# EAGLE board TiltyOmni (EAGLE 6.5.0)
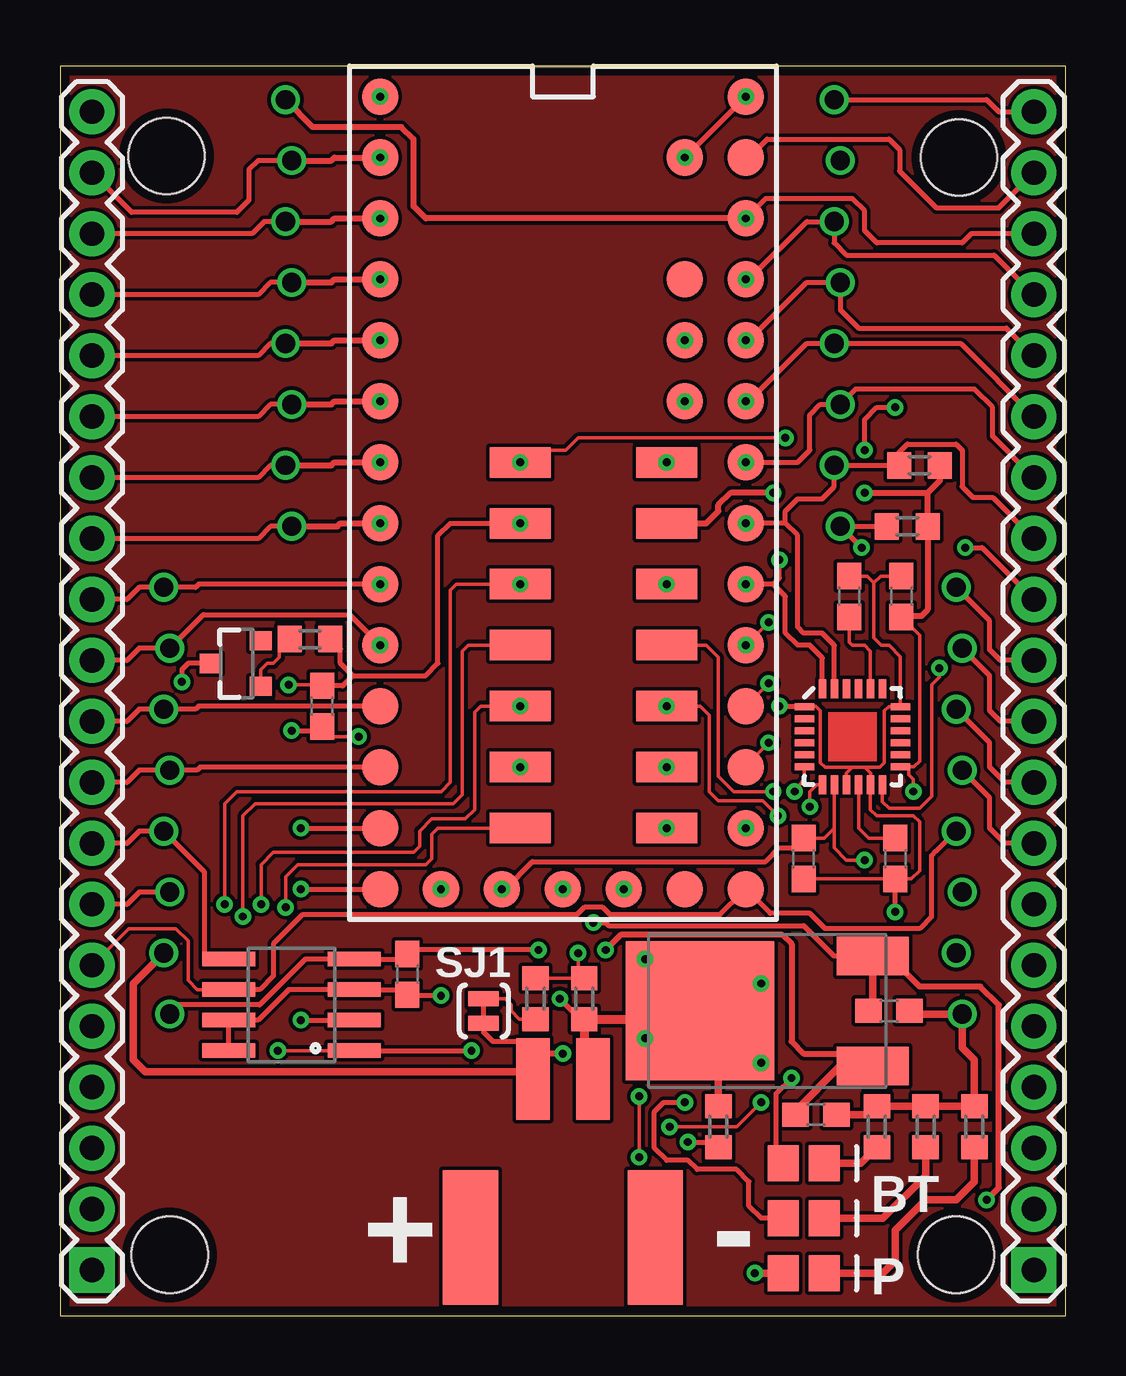
[diagram p0: board, top side]
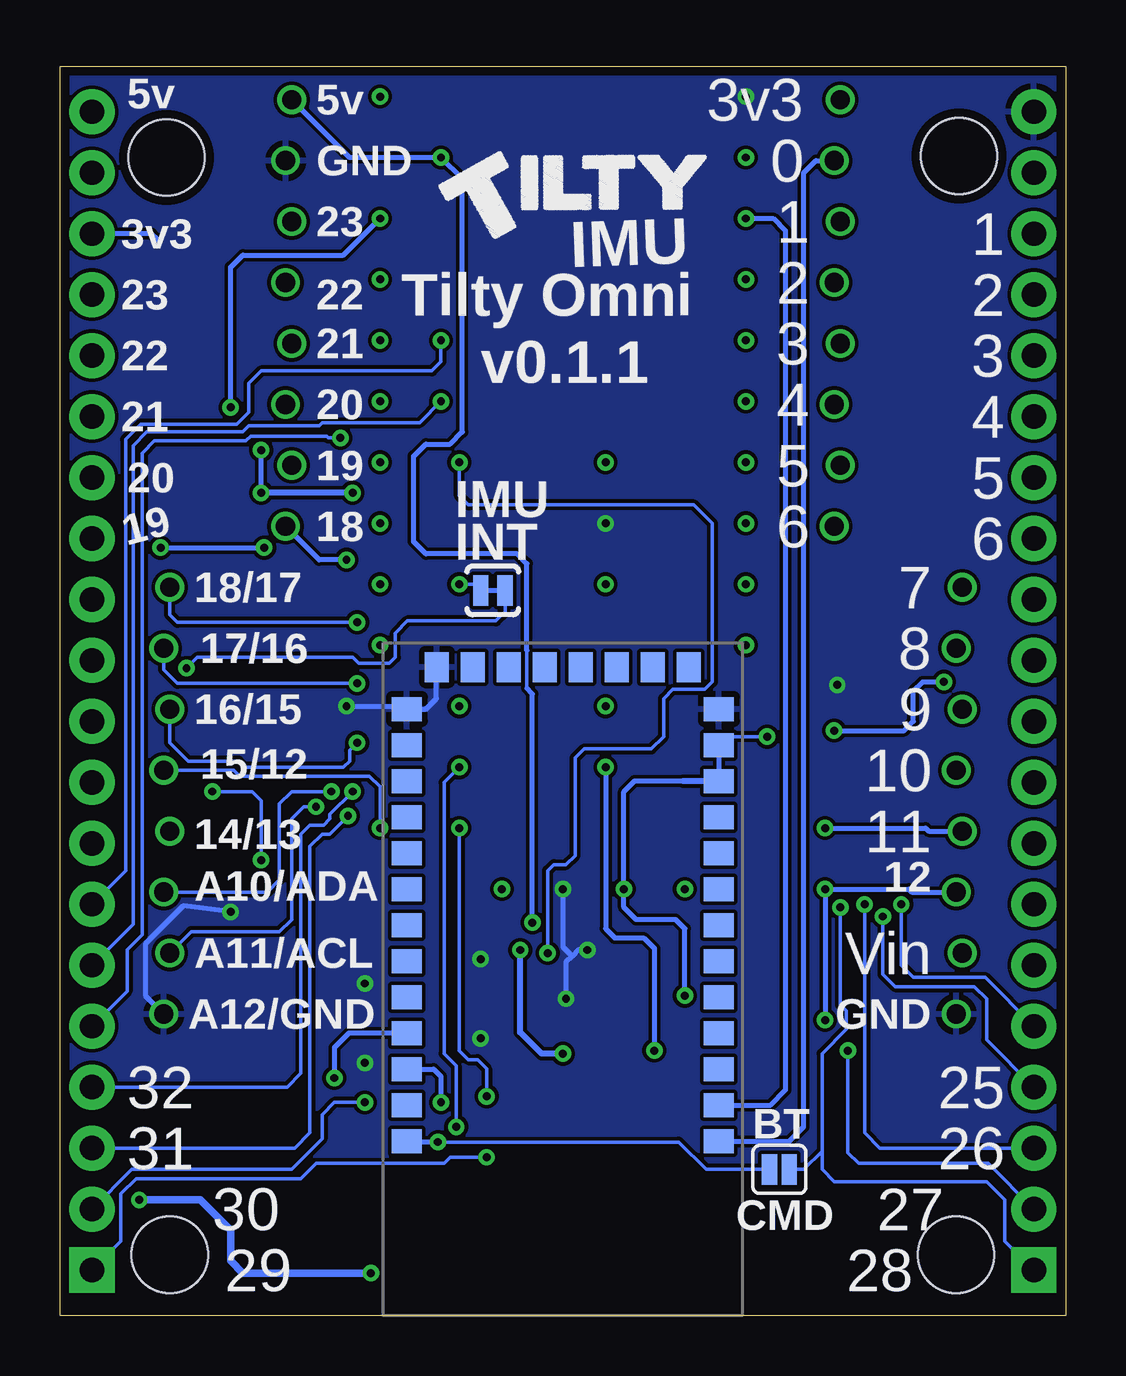
[diagram p1: board, bottom side, seen from below]

Size 41.91 x 52.07 mm. Coordinates in mm from the lower left corner, seen from the top.
Outline: 0,0 41.91,0 41.91,52.07 0,52.07 0,0
Copper layers (1*16): Top 0.0356mm / dielectric 1.5011mm / Bottom 0.0356mm
Design rules "LaenPCBOrder": minimum track width 6mil, minimum drill 13mil, track to track 6mil, track to pad 6mil, pad to pad 6mil, via to via 6mil, smd to smd 6mil, copper to edge 15mil, drill to drill 6mil, minimum pad ring 7mil, minimum via ring 7mil, stop-mask expansion 4mil, vias tented up to drill 0mil, thermal gap 10mil
Holes 3.17 mm at 37.34,2.54 4.57,2.54 4.45,48.32 37.47,48.26

## Footprints (pad centres in the part's own frame; a part is rotated, then mirrored left to right if it is on the bottom)
C0603 = smd 1.1 x 1: 1 -0.85,0; 2 0.85,0
LED-0805 = smd 1.3 x 1.5: 1 -0.85,0; 2 0.85,0
SOT23-3 = smd 0.8 x 0.9: 1 -0.95,-1; 2 0.95,-1; 3 0,1.1
8-PIN_RECEPTACLE_LOCK_NO-SS = drill 0.8: P$1 -8.89,-0.127; P$2 -6.35,0.127; P$3 -3.81,-0.127; P$4 -1.27,0.127; P$5 1.27,-0.127; P$6 3.81,0.127; P$7 6.35,-0.127; P$8 8.89,0.127
2-POS_SMD_TERMINAL_BLOCK = smd 2.3 x 5.6: P$1 -3.85,-2.325; P$2 3.85,-2.325 | smd 1.4 x 3.4: P$3 -1.25,4.275; P$4 1.25,4.275
1X20 = drill 1.016 pad 1.88 square: 1 0,0 | drill 1.016 pad 1.88: 2 2.54,0; 3 5.08,0; 4 7.62,0; 5 10.16,0; 6 12.7,0; 7 15.24,0; 8 17.78,0; 9 20.32,0; 10 22.86,0; 11 25.4,0; 12 27.94,0; 13 30.48,0; 14 33.02,0; 15 35.56,0; 16 38.1,0; 17 40.64,0; 18 43.18,0; 19 45.72,0; 20 48.26,0
SJ_2S-TRACE = smd 0.635 x 1.27: 1 -0.508,0; 2 0.508,0
R0603 = smd 1 x 1.1: 1 -0.85,0; 2 0.85,0
SJ_2S = smd 0.635 x 1.27: 1 -0.412,0; 2 0.412,0
TEENSY_3.0_ALLPINS-SMD = smd 1.524 x 1.524: 0 -7.62,13.97; 1 -7.62,11.43; 2 -7.62,8.89; 3 -7.62,6.35; 3.3V 7.62,11.43; 3.3V1 -2.54,-16.51; 4 -7.62,3.81; 5 -7.62,1.27; 6 -7.62,-1.27; 7 -7.62,-3.81; 8 -7.62,-6.35; 9 -7.62,-8.89; 10 -7.62,-11.43; 11 -7.62,-13.97; 12 -7.62,-16.51; 13 7.62,-16.51; 14/A0 7.62,-13.97; 15/A1 7.62,-11.43; 16/A2 7.62,-8.89; 17/A3 7.62,-6.35; 18/A4 7.62,-3.81; 19/A5 7.62,-1.27; 20/A6 7.62,1.27; 21/A7 7.62,3.81; 22/A8 7.62,6.35; 23/A9 7.62,8.89; A10 5.08,6.35; A11 5.08,3.81; AGND 7.62,13.97; AREF 5.08,8.89; GND -7.62,16.51; GND1 0,-16.51; PGM 2.54,-16.51; RESET 5.08,-16.51; VBAT -5.08,-16.51; VIN 7.62,16.51; VUSB 5.08,13.97 | smd 2.54 x 1.27: 3.3V2 4.318,-1.27; 24 -1.778,-3.81; 25 -1.778,-6.35; 26 -1.778,-8.89; 27 -1.778,-11.43; 28 -1.778,-13.97; 29 4.318,-13.97; 30 4.318,-11.43; 31 4.318,-8.89; 32 4.318,-6.35; 33 4.318,-3.81; A12 -1.778,1.27; A13 4.318,1.27; GND2 -1.778,-1.27
HC-09_BREAKOUT = smd 1.25 x 1: P$1 -6.5,10.5; P$2 -6.5,9; P$3 -6.5,7.5; P$4 -6.5,6; P$5 -6.5,3; P$6 -6.5,4.5; P$7 -6.5,1.5; P$8 -6.5,0; P$9 -6.5,-1.5; P$10 -6.5,-3; P$11 -6.5,-4.5; P$12 -6.5,-6; P$13 -6.5,-7.5; P$22 6.5,-7.5; P$23 6.5,-6; P$24 6.5,-4.5; P$25 6.5,-3; P$26 6.5,-1.5; P$27 6.5,0; P$28 6.5,1.5; P$29 6.5,3; P$30 6.5,4.5; P$31 6.5,6; P$32 6.5,7.5; P$33 6.5,9; P$34 6.5,10.5 | smd 1 x 1.25: P$14 -5.25,-9.25; P$15 -3.75,-9.25; P$16 -2.25,-9.25; P$17 -0.75,-9.25; P$18 0.75,-9.25; P$19 2.25,-9.25; P$20 3.75,-9.25; P$21 5.25,-9.25
TO263 = smd 5.791 x 6.198: P$1 0,2.794 | smd 1.6 x 2.997: P$2 -2.286,-4.394; P$3 2.286,-4.394
QFN-24 = smd 0.8 x 0.3: 1 -2,1.25; 2 -2,0.75; 3 -2,0.25; 4 -2,-0.25; 5 -2,-0.75; 6 -2,-1.25; 13 2,-1.25; 14 2,-0.75; 15 2,-0.25; 16 2,0.25; 17 2,0.75; 18 2,1.25 | smd 0.3 x 0.8: 7 -1.25,-2; 8 -0.75,-2; 9 -0.25,-2; 10 0.25,-2; 11 0.75,-2; 12 1.25,-2; 19 1.25,2; 20 0.75,2; 21 0.25,2; 22 -0.25,2; 23 -0.75,2; 24 -1.25,2
SO08 = smd 0.61 x 2.21: 1 -1.905,-2.616; 2 -0.635,-2.616; 3 0.635,-2.616; 4 1.905,-2.616; 5 1.905,2.616; 6 0.635,2.616; 7 -0.635,2.616; 8 -1.905,2.616

## Placement (x,y rotation side)
C1  0.1uF  [C0603]  34.8,19.05 270 top
C2  0.1uF  [C0603]  30.99,19.05 90 top
C3  2.2nF  [C0603]  32.89,29.97 90 top
C4  0.1uF  [C0603]  31.5,8.38 0 top
C5  4.7uF  [C0603]  34.54,12.7 0 top
C9  0.1uF  [C0603]  10.92,25.4 90 top
C11  0.1uF  [C0603]  35.05,29.97 270 top
C13  0.1uF  [C0603]  14.48,14.22 270 top
D1  RED  [LED-0805]  30.99,6.35 0 top
D2  GREEN  [LED-0805]  30.99,1.78 0 top
D3  YELLOW  [LED-0805]  30.99,4.06 0 top
D5  [SOT23-3]  7.37,27.18 90 top
JP1  8-PIN_HEADER  [8-PIN_RECEPTACLE_LOCK_NO-SS]  9.53,41.78 270 top
JP2  8-PIN_HEADER  [8-PIN_RECEPTACLE_LOCK_NO-SS]  4.45,21.46 270 top
JP3  8-PIN_HEADER  [8-PIN_RECEPTACLE_LOCK_NO-SS]  37.47,21.46 270 top
JP4  8-PIN_HEADER  [8-PIN_RECEPTACLE_LOCK_NO-SS]  32.38,41.78 270 top
JP5  2-POS_SMD_TERM_BLOCK  [2-POS_SMD_TERMINAL_BLOCK]  20.95,5.59 0 top
JP6  M20  [1X20]  1.33,1.91 90 top
JP7  M20  [1X20]  40.58,1.91 90 top
MPU_INT  SOLDERJUMPERTRACE  [SJ_2S-TRACE]  23.88,30.23 0 bottom
R1  4.7K  [R0603]  35.81,35.43 0 top
R2  4.7K  [R0603]  35.31,32.89 0 top
R3  180  [R0603]  34.04,7.87 270 top
R4  68  [R0603]  38.1,7.87 90 top
R5  10k  [R0603]  19.81,13.21 90 top
R6  680  [R0603]  21.84,13.21 90 top
R7  10K  [R0603]  27.43,7.87 270 top
R8  68  [R0603]  36.07,7.87 270 top
R9  [R0603]  10.41,28.19 180 top
SJ4  SOLDERJUMPERTRACE  [SJ_2S-TRACE]  17.65,12.7 90 top
SJ5  [SJ_2S]  11.94,6.1 180 bottom
U1  TEENSY_3.0_ALLPINSTEENSY_3.0_ALLPINS-SMD  [TEENSY_3.0_ALLPINS-SMD]  20.95,34.29 0 top
U2  HC-09_BREAKOUT  [HC-09_BREAKOUT]  20.95,17.78 180 bottom
U4  LM2931  [TO263]  29.46,12.7 90 top
U5  MPU-6050  [QFN-24]  33.02,24.13 0 top
U7  SPI_FLASH-X25XXSMD  [SO08]  9.65,12.95 90 top

## Library data of the parts
C1 C9 C13 = resistor; RATED_VOLTAGE: 2
C2 C4 C5 C11 R1-R9 = resistor
C3 = resistor; RATED_VOLTAGE: 50
D1-D3 = SparkFun-LED
D5 = SparkFun-DiscreteSemi; PART#: BZX84C3V3LT1GOSCT-ND
JP1-JP4 = My Parts
JP5 = My Parts; PART#: 277-2337-1-ND; POSSIBLE_ALT: 009276002021106
JP6 JP7 = SparkFun-Connectors
MPU_INT SJ4 SJ5 = SparkFun-Passives
U1 = Teensy3.0
U2 = csr
U4 = on-semiconductor; COST: 0.53
U5 = SparkFun-Sensors
U7 = SparkFun-DigitalIC; PART#: S25FL204K0TMFI043

## Nets
3V_SCL: JP4.P$7 JP7.13 R1.1 U1.19/A5 U5.23
3V_SDA: JP4.P$8 JP7.12 R2.1 U1.18/A4 U5.24
4/PWM: JP1.P$6 JP6.15 U1.4
5/PWM: JP1.P$7 JP6.14 U1.5
5V_SCL: JP3.P$2 JP7.10 U1.16/A2
5V_SDA: JP3.P$1 JP7.11 U1.17/A3
6/PWM: JP1.P$8 JP6.13 U1.6
7/RX3: JP2.P$1 JP6.12 U1.7
8/TX3: JP2.P$2 JP6.11 U1.8
9/RX2: JP2.P$3 JP6.10 U1.9
10/TX2: JP2.P$4 JP6.9 U1.10
14/A0: JP3.P$4 JP7.8 U1.14/A0
15/A1: JP3.P$3 JP7.9 U1.15/A1
20/A6: JP4.P$6 JP7.14 U1.20/A6
21/A7: JP4.P$5 JP7.15 U1.21/A7
24: JP6.5 U1.24
25: JP6.4 U1.25
26: JP6.3 U1.26
29: JP7.1 U1.29
30: JP7.2 U1.30
31: JP7.3 U1.31
32: JP7.4 U1.32
+3V3: C2.2 C9.1 C11.2 C13.2 D5.3 JP1.P$1 JP7.18 R1.2 R2.2 U1.3.3V U1.3.3V1 U1.3.3V2 U2.P$11 U2.P$12 U5.8 U5.13 U7.3 U7.7 U7.8
+5V: C5.1 D2.1 JP4.P$1 JP7.20 U1.VIN U1.VUSB U4.P$3
A10: JP7.7 U1.A10
A11: JP7.6 U1.A11
A12: JP7.5 U1.A12
AGND: JP7.19 U1.AGND
AREF: U1.AREF
AUXCL [I/O]: JP3.P$7 U5.7
AUXDA [I/O]: JP3.P$6 U5.6
BATT_SENSE: R5.2 R6.2 U1.A13
BLUETOOTH_RX: JP1.P$2 JP6.19 U1.0 U2.P$1
BLUETOOTH_TX: JP1.P$3 JP6.18 U1.1 U2.P$2
BT_CMD: JP6.1 SJ5.1 U1.28
CMD: R7.2 SJ5.2 U2.P$34
GND: C1.2 C2.1 C3.2 C4.2 C5.2 C9.2 C11.1 C13.1 JP2.P$8 JP3.P$8 JP4.P$2 JP5.P$4 JP6.20 R3.1 R4.2 R6.1 R7.1 R8.1 R9.1 U1.GND U1.GND1 U1.GND2 U2.P$13 U2.P$21 U2.P$22 U4.P$1 U5.1 U5.9 U5.11 U5.18 U7.4
IMU_INT: MPU_INT.1 U1.33
MEMORY_CS: JP6.2 U1.27 U7.1
MISO: JP2.P$6 JP6.7 U1.12 U7.2
MOSI: JP2.P$5 JP6.8 U1.11 U7.5
N$1: C1.1 U5.10
N$2: C3.1 U5.20
N$3: D1.2 R3.2
N$5: D5.1 R9.2
N$9: R5.1 SJ4.2
N$13: D2.2 R4.1
N$14: D1.1 U2.P$31
N$16: MPU_INT.2 U5.12
N$24: D3.2 R8.2
SCK: JP3.P$5 JP6.6 U1.13 U7.6
SERVO_1: JP1.P$4 JP6.17 U1.2
SERVO_2: JP1.P$5 JP6.16 U1.3
SERVO_3: JP4.P$4 JP7.16 U1.22/A8
SERVO_4: JP4.P$3 JP7.17 U1.23/A9
VBAT: U1.VBAT
VCC: C4.1 JP2.P$7 JP5.P$3 SJ4.1 U4.P$2
YEL_LED: D3.1 U2.P$32

## Tracks (layer width: path | path; a pad name or v marks a point on that pad's centre or on a via)
3V_SCL  (via drill 0.33)
  Top 0.203: U5.23 32.27,27.93 31.75,28.45 30.99,28.45 30.73,28.7 30.73,32.51 30.23,33.02 | 30.23,33.02 U1.19/A5 | 30.23,33.02 30.23,33.53 30.73,34.04 31.75,34.04 32.26,34.54 JP4.P$7 R1.1 34.96,35.98 35.31,36.32 37.34,36.32 37.59,36.07 37.59,34.54 38.04,34.1 38.86,34.1 JP7.13
  other vias: 28.57,33.02
3V_SDA  (via drill 0.33)
  Top 0.203: U5.24 31.77,27.41 31.24,27.94 30.73,27.94 30.23,28.45 30.23,29.97 29.72,30.48 | 29.72,30.48 U1.18/A4 | 29.72,30.48 29.97,30.73 v29.97,31.5 | R2.1 JP4.P$8 v33.4,32 | v37.72,32 38.42,32 JP7.12
  Bottom 0.203: v37.72,32 v33.4,32 | v29.97,31.5 31.11,31.5 JP4.P$8
  other vias: 28.57,30.48
4/PWM  (via drill 0.33)
  Top 0.203: JP1.P$6 8.76,37.97 8.26,37.47 JP6.15
  Top 0.254: JP1.P$6 11.3,37.97 11.43,38.1 v13.34,38.1
5/PWM  (via drill 0.33)
  Top 0.203: JP1.P$7 8.76,35.43 8.26,34.92 JP6.14
  Top 0.254: JP1.P$7 11.3,35.43 11.43,35.56 v13.34,35.56
5V_SCL  (via drill 0.33)
  Top 0.152: U1.16/A2 v29.53,26.35
  Top 0.203: JP7.10 39.18,24.77 38.73,25.21 38.73,26.67 JP3.P$2
  Bottom 0.152: v29.53,26.35 37.02,26.35 37.59,26.92 JP3.P$2
5V_SDA  (via drill 0.33)
  Top 0.152: U1.17/A3 v29.53,28.89
  Top 0.203: JP7.11 39.18,27.3 38.73,27.75 38.73,28.96 JP3.P$1
  Bottom 0.152: v29.53,28.89 37.02,28.89 37.34,29.21 JP3.P$1
  other vias: 28.57,27.94
6/PWM  (via drill 0.33)
  Top 0.203: JP1.P$8 8.76,32.89 8.26,32.38 JP6.13
  Top 0.254: JP1.P$8 11.56,32.89 11.68,33.02 v13.34,33.02
7/RX3  (via drill 0.33)
  Top 0.203: v13.34,30.48 5.78,30.48 5.65,30.35 JP2.P$1 3.3,30.35 2.79,29.84 JP6.12
8/TX3  (via drill 0.33)
  Top 0.203: v13.34,27.94 12.06,29.21 5.97,29.21 JP2.P$2 3.3,27.81 2.79,27.3 JP6.11
9/RX2
  Top 0.203: U1.9 5.78,25.4 5.65,25.27 JP2.P$3 3.3,25.27 2.79,24.77 JP6.10
10/TX2
  Top 0.203: U1.10 5.84,22.86 5.71,22.73 JP2.P$4 3.3,22.73 2.79,22.23 JP6.9
14/A0  (via drill 0.33)
  Top 0.203: JP7.8 39.37,19.68 38.73,20.32 38.73,21.59 JP3.P$4
  Bottom 0.152: JP3.P$4 34.67,22.73 34.42,22.48 29.02,22.48 28.57,22.04 U1.14/A0
  other vias: 28.57,20.32
15/A1  (via drill 0.33)
  Top 0.152: U1.15/A1 28.57,22.92 v29.53,23.88
  Top 0.203: JP7.9 39.37,22.23 38.73,22.86 38.73,23.88 JP3.P$3
  Bottom 0.152: v29.53,23.88 29.84,23.56 29.84,23.11 30.1,22.86 34.23,22.86 34.48,23.11 36.58,23.11 37.34,23.88 JP3.P$3
20/A6  (via drill 0.33)
  Top 0.203: JP7.14 38.86,36.64 38.86,37.85 38.1,38.61 33.15,38.61 JP4.P$6 31.69,37.97 31.24,37.53 31.24,36.07 30.73,35.56 U1.20/A6
  other vias: 28.57,35.56
21/A7  (via drill 0.33)
  Top 0.203: U1.21/A7 28.7,38.1 31.11,40.51 JP4.P$5 37.53,40.51 JP7.15
  other vias: 28.57,38.1
24  (via drill 0.33)
  Top 0.152: U1.24 16.51,30.48 16.26,30.23 16.26,22.23 15.88,21.84 7.37,21.84 6.86,21.34 v6.86,17.14
  Bottom 0.152: v6.86,17.14 6.86,14.61 6.35,14.1 3.37,14.1 JP6.5
  other vias: 19.18,30.48
25  (via drill 0.33)
  Top 0.152: U1.25 17.02,27.94 16.76,27.69 16.76,21.72 16.38,21.34 8.13,21.34 7.62,20.83 v7.62,16.64
  Bottom 0.152: JP6.4 3.3,11.49 3.3,13.21 3.81,13.72 7.11,13.72 7.62,14.22 v7.62,16.64
26  (via drill 0.33)
  Top 0.152: U1.26 17.53,25.4 17.27,25.15 17.27,21.08 16.89,20.7 15.49,20.7 14.99,20.19 14.99,19.56 14.73,19.3 8.89,19.3 8.38,18.8 v8.38,17.14
  Bottom 0.152: v8.38,17.14 8.38,7.62 7.75,6.99 JP6.3
  other vias: 19.18,25.4
29  (via drill 0.33)
  Top 0.152: v24.13,9.14 v24.13,6.6
  Bottom 0.152: JP7.1 39.37,3.11 39.37,5.08 38.73,5.71 31.88,5.71 31.24,6.35 25.91,6.35 25.65,6.6 v24.13,6.6 | U1.29 25.27,11.05 24.89,10.67 24.51,10.67 24.13,10.29 v24.13,9.14
  other vias: 25.27,20.32
30  (via drill 0.33)
  Top 0.152: v25.4,7.87 28.19,7.87 v29.21,8.89
  Bottom 0.152: v29.21,8.89 30.48,8.89 30.99,8.38 30.99,7.37 32.26,6.1 38.92,6.1 JP7.2 | U1.30 25.91,22.23 25.91,10.92 25.4,10.41 v25.4,7.87
  other vias: 25.27,22.86
31  (via drill 0.33)
  Top 0.152: U1.31 26.67,25.4 27.05,25.02 27.05,21.84 27.43,21.46 29.27,21.46 v29.91,20.83
  Bottom 0.152: JP7.3 32.13,6.99 31.5,7.62 31.5,19.56 30.99,20.07 30.67,20.07 v29.91,20.83
  other vias: 25.27,25.4
32  (via drill 0.33)
  Top 0.152: U1.32 26.92,27.94 27.43,27.43 27.43,22.48 28.07,21.84 v29.72,21.84
  Bottom 0.152: JP7.4 32.45,9.53 31.88,10.1 31.88,20.07 31.5,20.45 30.92,20.45 30.67,20.7 30.67,20.89 v29.72,21.84
+3V3  (via drill 0.33)
  Top 0.152: C2.2 31.84,19.9 32.26,20.32 | 32.26,20.32 32.26,22.12 U5.8 32.27,20.33 32.26,20.32 | 32.26,20.32 32.26,19.49 32.77,18.99 v33.53,18.99 | C11.2 35.81,28.36 35.81,23.11 35.58,22.88 U5.13 35.05,22.85 35.32,22.85 35.37,22.8 35.37,22.54 35.56,22.35 v35.56,21.84 | v12.45,24.13 11.34,24.13 C9.1
  Top 0.203: U7.8 U7.7 8.26,12.32 9.53,13.59 U7.3 14.26,13.59 C13.2 14.52,13.34 v15.88,13.34 | U1.3.3V1 18.54,17.78 19.68,18.92 29.4,18.92 29.97,19.49 30.58,19.49 C2.2 30.9,19.81 | JP7.18 37.97,45.09 37.59,44.7 34.04,44.7 33.53,45.21 33.53,46.04 33.02,46.55 29.4,46.55 U1.3.3V | v9.65,24.38 10.76,24.38 C9.1 | D5.3 5.33,27.18 5.08,26.92 v5.08,26.42 | v33.53,36.07 33.53,37.34 34.04,37.85 v34.8,37.85
  Top 0.254: U1.3.3V2 26.92,33.02 27.43,33.53 27.43,33.78 27.94,34.29 v29.72,34.29 | v33.53,34.29 36.16,34.29 | 36.16,34.29 36.66,34.8 R1.2 | C11.2 35.08,29.15 35.88,29.15 36.16,29.43 R2.2 36.16,34.29 | U1.3.3V 15.24,45.72 14.73,46.23 14.73,49.02 14.22,49.53 10.54,49.53 JP1.P$1
  Bottom 0.152: v33.53,18.99 33.53,21.46 33.91,21.84 v35.56,21.84 | v12.45,24.13 14.11,24.13 U2.P$12
  Bottom 0.203: U2.P$12 U2.P$11 | 37.85,44.83 38.1,45.09 JP7.18 | v9.65,24.38 6.73,24.38 6.35,24.77 6.35,26.04 5.97,26.42 v5.08,26.42 | 15.95,22.28 17.98,22.28 18.41,21.84 U1.3.3V1 18.41,17.02 17.91,16.51 16.26,16.51 15.88,16.13 v15.88,13.34 | v33.53,34.29 v33.53,36.07 | v34.8,37.85 34.8,43.69 34.29,44.2 30.1,44.2 U1.3.3V
  Bottom 0.254: v29.72,34.29 v33.53,34.29 | U2.P$11 15.95,22.28
  other vias: 18.41,17.78 28.57,45.72
+5V  (via drill 0.33)
  Top 0.203: JP4.P$1 38.61,50.67 39.12,50.16 JP7.20 | U4.P$3 32.26,14.99 30.99,16.26 22.86,16.26 22.73,16.38 v22.23,16.38 | U1.VIN v26.04,48.26
  Top 0.254: v38.61,4.83 39.12,5.33 39.12,12.95 38.35,13.72 35.81,13.72 34.8,14.73 34.11,14.73 U4.P$3
  Top 0.305: U4.P$3 33.86,12.86 C5.1 | v28.96,1.78 D2.1
  Bottom 0.152: 22.45,26.16 22.45,27.71
  Bottom 0.203: v22.23,16.38 22.23,25.91 22.45,26.16 | 22.45,27.71 22.45,31.34 22.86,31.75 26.67,31.75 27.18,32.26 27.18,35.81 26.67,36.32 25.65,36.32 25.15,36.83 25.15,47.37 v26.04,48.26 29.84,48.26 JP4.P$1
  Bottom 0.305: v28.96,1.78 34.29,1.78 34.8,2.29 34.8,3.56 36.07,4.83 v38.61,4.83
  other vias: 28.57,50.8
A10  (via drill 0.33)
  Bottom 0.152: v26.04,40.64 26.04,39.75 26.42,39.37 33.53,39.37 34.04,38.86 34.04,37.66 34.54,37.15 38.54,37.15 39.18,36.51 39.18,18.54 JP7.7
A11  (via drill 0.33)
  Bottom 0.152: JP7.6 38.86,16.32 38.86,36.26 38.29,36.83 34.29,36.83 34.04,37.08 31.11,37.08 30.99,37.21 26.92,37.21 v26.04,38.1
A12  (via drill 0.33)
  Top 0.152: v30.23,36.58 21.59,36.58 21.08,36.07 19.68,36.07 U1.A12
  Bottom 0.152: JP7.5 39.12,13.53 39.12,15.24 38.48,15.88 38.48,35.94 37.97,36.45 34.16,36.45 33.97,36.64 30.8,36.64 30.73,36.58 v30.23,36.58
  other vias: 19.18,35.56
AGND
  Top 0.203: U1.AGND 28.7,48.26 29.46,49.02 34.54,49.02 34.99,48.58 34.99,47.69 36.51,46.16 39.12,46.16 JP7.19
AUXCL  (via drill 0.33)
  Top 0.152: U5.7 31.53,22.13 31.24,21.84 v31.24,21.21
  Bottom 0.152: v31.24,21.21 31.75,21.21 32.26,20.7 32.26,16.51 32.77,16 36.45,16 JP3.P$7
AUXDA  (via drill 0.33)
  Top 0.152: U5.6 31.02,22.38 v30.61,21.84
  Bottom 0.152: v30.61,21.84 32.26,21.84 32.77,21.34 32.77,18.16 33.27,17.65 JP3.P$6
BATT_SENSE  (via drill 0.33)
  Top 0.152: 21.87,14.03 R6.2 | v21.59,15.11 21.59,14.31 R6.2 | R5.2 R6.2
  Bottom 0.152: v21.59,15.11 21.59,18.54 21.34,18.8 20.83,18.8 20.45,19.18 20.45,23.24 20.07,23.62 17.27,23.62 16.76,24.13 16.76,25.72 16.38,26.1 15.05,26.1 14.73,26.42 14.73,33.02 15.49,33.78 24.89,33.78 25.27,34.16 U1.A13
  other vias: 25.27,35.56
BLUETOOTH_RX  (via drill 0.33)
  Top 0.203: JP1.P$2 8.26,48.13 7.87,47.75 7.87,46.48 7.37,45.97 2.98,45.97 JP6.19
  Top 0.254: JP1.P$2 11.3,48.13 11.43,48.26 v13.34,48.26
  Bottom 0.203: U2.P$1 11.52,7.28 10.92,7.87 10.92,47.62 10.41,48.13 JP1.P$2
BLUETOOTH_TX  (via drill 0.33)
  Top 0.203: JP1.P$3 8.51,45.59 8,45.09 JP6.18
  Top 0.254: JP1.P$3 11.3,45.59 11.43,45.72 v13.34,45.72
  Bottom 0.203: v13.34,45.72 12.19,45.72 11.68,45.21 11.68,9.4 12.3,8.78 U2.P$2
BT_CMD  (via drill 0.33)
  Top 0.152: U1.28 15.75,20.32 15.49,20.07 15.49,19.05 15.24,18.8 9.91,18.8 9.4,18.29 v9.4,17.02
  Bottom 0.152: v9.4,17.02 9.4,12.95 9.14,12.7 9.14,11.94 10.16,10.92 10.16,6.86 | 10.16,6.86 10.16,6.1 9.65,5.59 3.3,5.59 2.54,4.83 2.54,3.11 JP6.1 | SJ5.1 10.92,6.1 10.16,6.86
CMD  (via drill 0.33)
  Top 0.203: v26.16,7.24 27.22,7.24 R7.2
  Bottom 0.152: SJ5.2 14.99,6.1 16.13,7.24 v26.16,7.24
  Bottom 0.203: v26.16,7.24 27.41,7.24 U2.P$34
GND  (via drill 0.33)
  Top 0.152: C2.1 C1.2 35.47,18.2 35.81,18.54 35.81,20.57 35.56,20.83 34.04,20.83 33.77,21.09 U5.11 33.78,22.14 33.78,22.61 33.53,22.86 | U5.9 32.77,22.61 33.02,22.86 | 33.02,22.86 33.53,22.86 | 33.02,22.86 31.88,22.86 31.69,23.05 31.69,25.21 31.5,25.4 31.04,25.4 U5.1 | C11.1 34.19,30.82 33.91,30.54 | 33.91,30.54 33.91,28.26 34.23,27.94 34.54,27.94 35.02,27.46 U5.18 34.52,25.38 34.35,25.21 34.35,23.05 34.16,22.86 33.53,22.86 | C3.2 33.63,30.82 33.91,30.54 | v9.53,26.29 10.88,26.29 C9.2
  Top 0.203: 12.19,26.67 11.77,26.25 C9.2 | 12.19,26.67 15.24,26.67 15.75,27.18 15.75,32.51 16.26,33.02 U1.GND2 | C13.1 14.26,14.86 U7.4 10.22,14.86 8.32,12.95 4.95,12.95 JP2.P$8 | 14.57,14.99 C13.1 | v29.97,25.4 31,25.4 U5.1 | 12.19,26.67 11.68,27.18 11.68,27.77 R9.1 | v34.8,16.83 C1.2 | R6.1 21.68,12.36 v20.83,13.21 | v19.94,15.24 14.64,15.24 C13.1 | C2.1 30.99,18.29 30.73,18.54
  Top 0.305: C4.2 33.69,8.38 R3.1 R8.1 R4.2 38.1,10.67 37.59,11.18 JP3.P$8 35.52,12.57 C5.2 | R7.1 27.43,11.94 U4.P$1
  Top 0.381: 26.06,13.31 U4.P$1 26.33,12.36 R6.1 21.84,10.22 JP5.P$4
  Bottom 0.203: U1.GND1 20.95,15.37 20.57,14.99 | 26.23,27.05 U2.P$21 26.23,27.01 26.23,25.72 26.66,25.28 U2.P$22 27.57,25.4 v29.97,25.4 | JP3.P$8 38.35,13.34 38.35,15.49 36.77,17.08 v34.8,16.83 | 20.57,14.99 20.83,14.73 v20.83,13.21 | v19.94,15.24 20.32,15.24 20.57,14.99
  other vias: 20.95,17.78 19.18,33.02 13.34,50.8 29.21,13.84 29.21,10.54 24.38,11.56 24.38,14.86
  pour Bottom: 0,52.07 41.91,52.07 41.91,0 0,0
IMU_INT  (via drill 0.33)
  Bottom 0.152: U1.33 24.64,30.48 MPU_INT.1
  other vias: 25.27,30.48
MEMORY_CS  (via drill 0.33)
  Top 0.152: U7.1 v9.08,11.05
  Top 0.203: U7.1 v17.14,11.05
  Bottom 0.152: v9.08,11.05 9.08,6.79 8.64,6.35 3.24,6.35 JP6.2
  Bottom 0.203: U1.27 19.18,16.13 18.8,15.75 17.59,15.75 17.14,15.3 v17.14,11.05
  other vias: 19.18,22.86
MISO  (via drill 0.33)
  Top 0.203: v10.03,17.78 U1.12 | v10.03,12.32 U7.2 | JP2.P$6 3.3,17.65 2.79,17.14 JP6.7
  Bottom 0.203: JP2.P$6 6.41,17.65 6.54,17.78 v10.03,17.78 v10.03,12.32
MOSI  (via drill 0.33)
  Top 0.203: U7.5 6.91,14.99 6.1,14.99 6.02,15.06 6.02,18.49 JP2.P$5 3.3,20.19 2.79,19.68 JP6.8 | v10.03,20.32 U1.11
  Bottom 0.203: v10.03,20.32 5.84,20.32 5.71,20.19 JP2.P$5
N$1
  Top 0.152: C1.1 33.69,19.9 33.27,20.32 U5.10
N$2
  Top 0.152: U5.20 33.77,27.7 33.53,27.94 33.02,27.94 32.89,28.07 C3.1
N$3
  Top 0.305: D1.2 33.36,6.35 R3.2
N$4  (via drill 0.33)
  other vias: 23.5,17.78
N$5
  Top 0.152: D5.1 8.37,26.91 8.64,27.18 8.89,27.18 9.14,27.43 9.14,27.77 R9.2
  Top 0.203: D5.1
N$6
  pour Top: 0,52.07 41.91,52.07 41.91,0 0,0
N$9
  Top 0.152: R5.1 19.14,12.36 18.8,12.7 18.8,12.95 18.54,13.21 SJ4.2
N$13
  Top 0.305: D2.2 34.29,1.78 34.8,2.29 34.8,3.56 36.07,4.83 37.34,4.83 38.1,5.59 R4.1
N$14  (via drill 0.33)
  Top 0.203: D1.1 29.84,6.35 29.84,9.27 v30.48,9.91
  Bottom 0.203: U2.P$31 29.88,11.78 30.48,11.18 v30.48,9.91
N$16  (via drill 0.33)
  Top 0.152: U5.12 34.27,21.42 34.54,21.14 35.81,21.14 36.32,21.65 36.32,26.29 36.64,26.61 v36.64,26.99
  Bottom 0.152: v36.64,26.99 36.2,27.43 29.72,27.43 29.46,27.18 28.19,27.18 27.94,27.43 27.94,28.45 27.43,28.96 23.75,28.96 23.37,29.34 MPU_INT.2
N$24
  Top 0.305: D3.2 34.29,4.06 36.07,5.84 R8.2
SCK
  Top 0.152: U7.6 5.71,13.59 5.33,13.97 5.33,15.62 4.83,16.13 2.86,16.13 JP6.6
  Top 0.203: U1.13 28.7,17.78 | U1.13 28.45,17.78 28.45,17.65 27.5,16.7 22.92,16.7 22.61,17.02 21.84,17.02 21.53,16.7 10.1,16.7 8.89,15.49 8.89,14.16 8.32,13.59 U7.6 | JP3.P$5 36.51,19.37 36.32,19.18 36.32,16.64 35.81,16.13 31.88,16.13 31.24,16.76 29.59,16.76 U1.13
SERVO_1  (via drill 0.33)
  Top 0.203: JP1.P$4 8.76,43.05 8.26,42.55 JP6.17
  Top 0.254: JP1.P$4 11.3,43.05 11.43,43.18 v13.34,43.18
SERVO_2  (via drill 0.33)
  Top 0.203: JP1.P$5 8.76,40.51 8.26,40.01 JP6.16
  Top 0.254: JP1.P$5 11.3,40.51 11.43,40.64 v13.34,40.64
SERVO_3  (via drill 0.33)
  Top 0.203: U1.22/A8 28.7,40.64 31.11,43.05 JP4.P$4 32.51,41.91 33.27,41.15 39.43,41.15 JP7.16
  other vias: 28.57,40.64
SERVO_4  (via drill 0.33)
  Top 0.203: JP7.17 38.92,44.2 32.77,44.2 32.26,44.7 JP4.P$3 31.11,45.59 28.7,43.18 U1.23/A9
  other vias: 28.57,43.18
VBAT  (via drill 0.33)
  other vias: 15.88,17.78
VCC  (via drill 0.33)
  Top 0.203: 30.65,8.55 C4.1 | SJ4.1 17.65,11.81 18.03,11.43 19.3,11.43 19.81,10.92
  Top 0.254: v20.95,10.92 19.81,10.92 19.81,9.97 JP5.P$3 | v22.73,15.24 23.37,15.88 30.1,15.88 30.48,15.49 30.48,11.43 30.99,10.92 33.35,10.92 U4.P$2
  Top 0.305: JP5.P$3 19.6,9.86 19.3,10.16 3.56,10.16 3.05,10.67 3.05,13.84 JP2.P$7 | 30.65,8.55 32.51,10.41 U4.P$2
  Bottom 0.254: v20.95,10.92 21.84,10.92 22.73,11.81 v22.73,15.24
YEL_LED  (via drill 0.33)
  Top 0.203: D3.1 29.21,4.06 28.7,4.57 28.7,5.59 28.19,6.1 26.54,6.1 26.16,6.48 25.27,6.48 24.77,6.99 24.77,8.51 25.15,8.89 v26.04,8.89
  Bottom 0.203: U2.P$32 26.35,10.28 26.04,9.97 v26.04,8.89

## Text on the board
tNames: SJ1 | BT | + | - | P
bNames: 3v3 | 5v | 5v | 0 | GND | 1 | 23 | 1 | IMU | 3v3 | 2 | 2 | Tilty Omni | 22 | 23 | 3 | 21 | 3 | v0.1.1 | 22 | 4 | 4 | 20 | 21 | 5 | 19 | 5 | 20 | IMU | 6 | 18 | 19 | 6 | INT | 18/17 | 7 | 8 | 17/16 | 16/15 | 9 | 10 | 15/12 | 11 | 14/13 | 12 | A10/ADA | Vin | A11/ACL | GND | A12/GND | 25 | 32 | BT | 26 | 31 | 27 | CMD | 30 | 28 | 29